# Altium PCB PCB.PcbDoc
Units mm, origin at the board's own origin, x right, y up, seen from the top; angles counter-clockwise.
Board outline 42.41 x 25.14 mm, 2 copper layers (Top Layer, Bottom Layer); 168 components, 11 nets, 360 pads, 0 vias.
Unrouted connection lines stored in the file: 1.
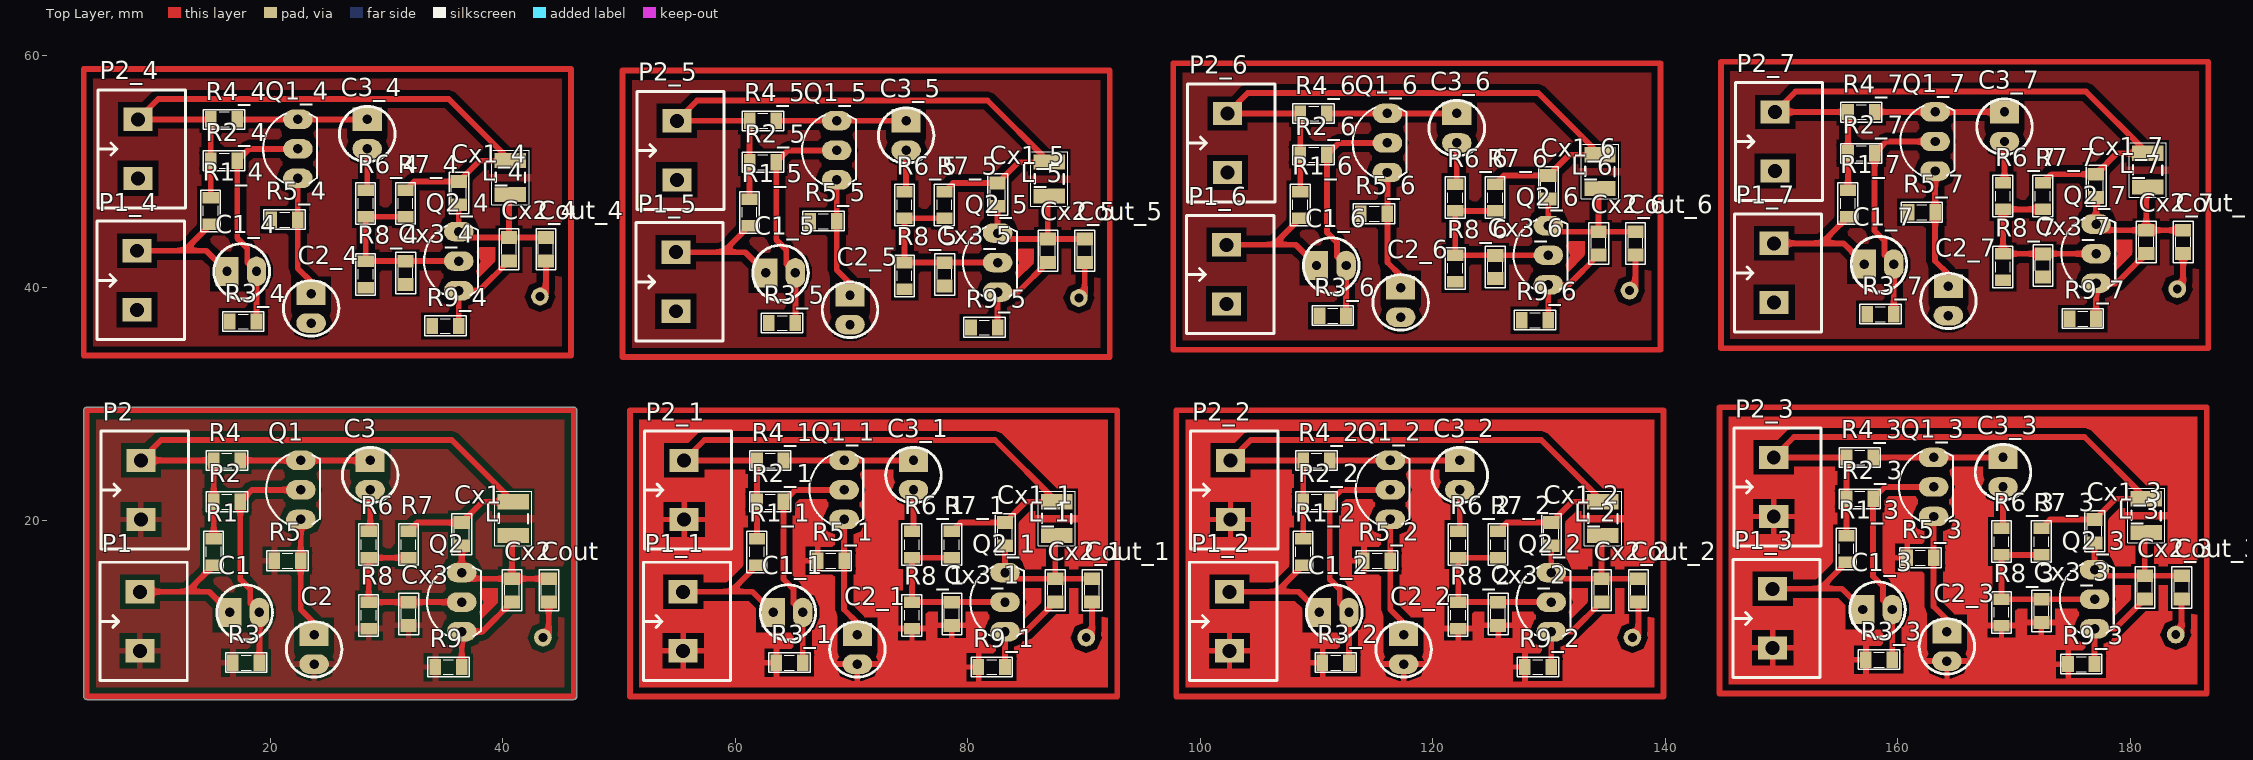
[diagram p0: Top Layer view]
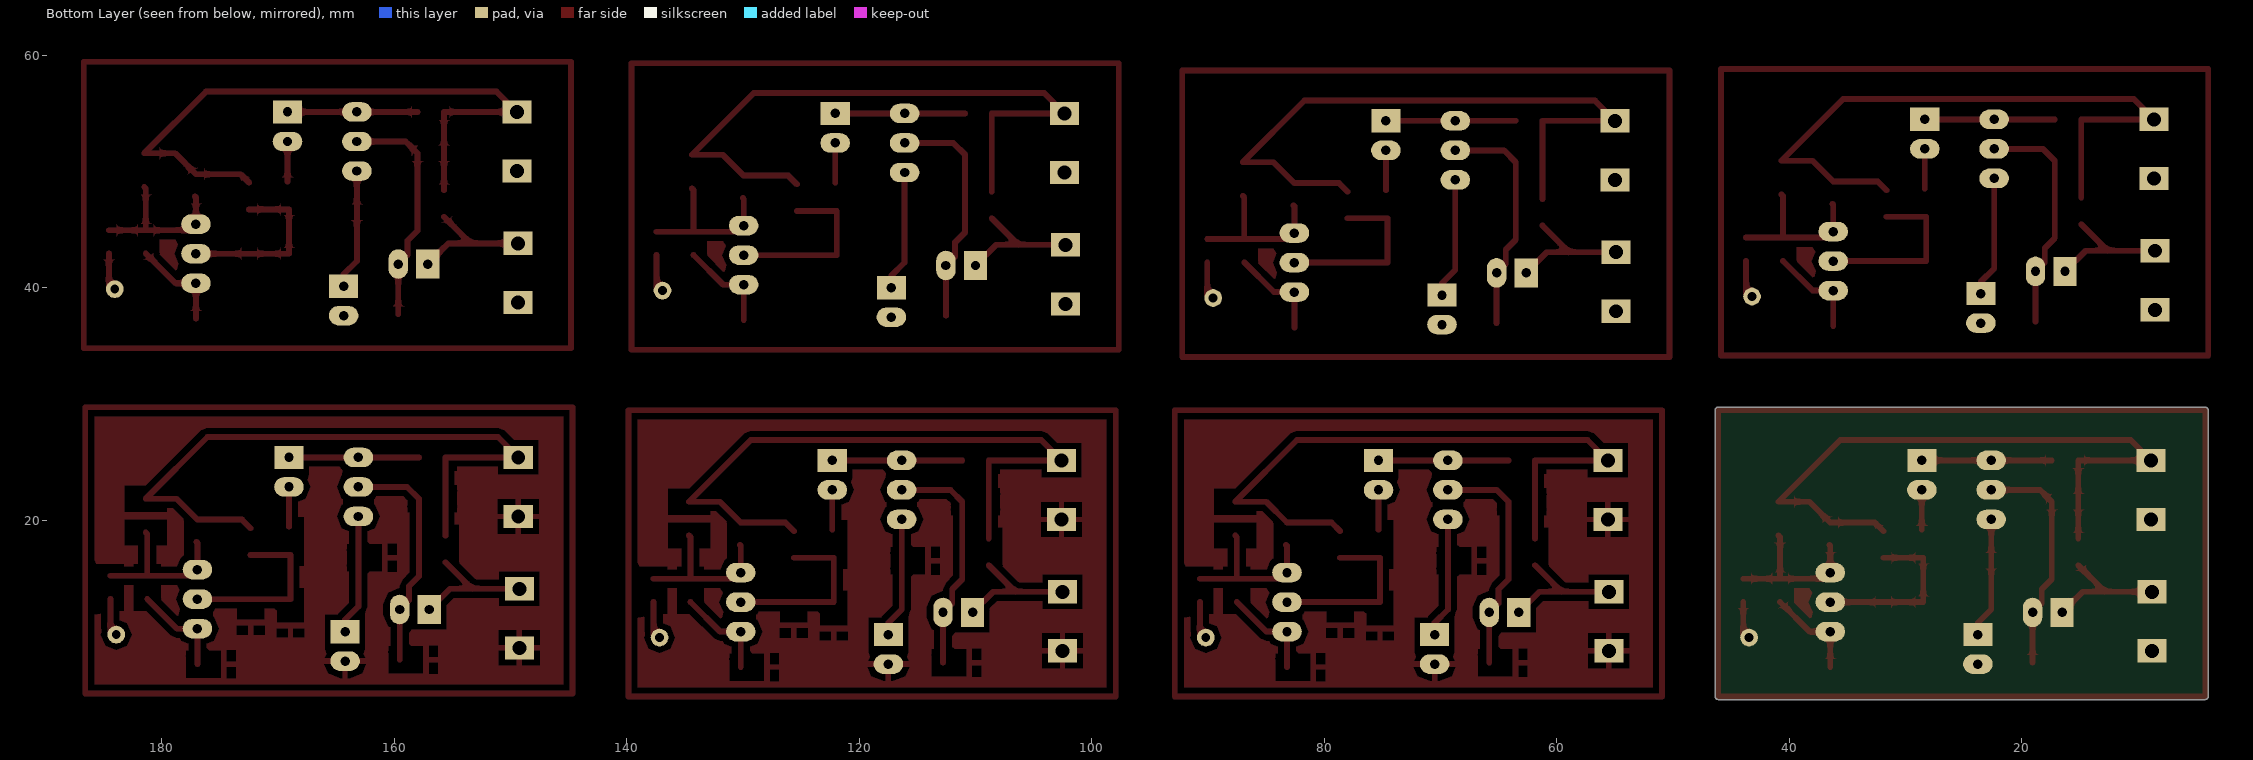
[diagram p1: Bottom Layer view, seen from below]

## Layer stack, top to bottom
Top Solder: solder mask 0.0102, Solder Resist, Dk 3.5
Top Layer: signal copper 0.0356
Dielectric 1: dielectric 0.32, FR-4, Dk 4.8
Bottom Layer: signal copper 0.0356
Bottom Solder: solder mask 0.0102, Solder Resist, Dk 3.5

## Board outline
4.191,4.576 cw(c4.191,4.826) 3.941,4.826 3.941,29.464 cw(c4.191,29.464) 4.191,29.714 46.101,29.714 cw(c46.101,29.464) 46.351,29.464 46.351,4.826 cw(c46.101,4.826) 46.101,4.576

## Design rules (kind name [scope] priority, off if disabled: settings)
Clearance [All] p1: gap=0.5
PlaneConnect [All] p1: planeconnectstyle=Relief reliefexpansion=0.508 reliefentries=4 reliefconductorwidth=5 reliefairgap=0.254
PolygonConnect [All] p1: connectstyle=Relief reliefconductorwidth=0.5 reliefentries=4 polygonreliefangle="90 Angle" airgapwidth=0.5
RoutingVias [All] p1: holewidth=0.711 width=1.27 viastyle="Through Hole" minholewidth=0.711 minwidth=1.27 maxholewidth=0.711 maxwidth=1.27
SolderMaskExpansion [All] p1: expansion=0.102
Width [All] p1: maxlimit=0.8 minlimit=0.5 preferedwidth=0.5
29 further rules are at their usual default settings.

## Classes and differential pairs
component class Sche: C1 C2 C3 Cout Cx1 Cx2 Cx3 L P1 P2 Q1 Q2 R1 R2 R3 R4 R5 R6 R7 R8 R9

## Components (designator, comment, footprint, x,y, rotation, side; value= is the part's Value field where it differs from the comment)
C1 "10u" CA-ALU-2.54 17.78,12.065 r0 top
C1_1 "10u" CA-ALU-2.54 64.516,12.065 r0 top (schematic designator C1)
C1_2 "10u" CA-ALU-2.54 111.506,12.065 r0 top (schematic designator C1)
C1_3 "10u" CA-ALU-2.54 158.242,12.319 r0 top (schematic designator C1)
C1_4 "10u" CA-ALU-2.54 17.526,41.402 r0 top (schematic designator C1)
C1_5 "10u" CA-ALU-2.54 63.881,41.275 r0 top (schematic designator C1)
C1_6 "10u" CA-ALU-2.54 111.252,41.91 r0 top (schematic designator C1)
C1_7 "10u" CA-ALU-2.54 158.369,42.037 r0 top (schematic designator C1)
C2 "47n" CA-ALU-2.54 23.749,8.89 r270 top
C2_1 "47n" CA-ALU-2.54 70.485,8.89 r270 top (schematic designator C2)
C2_2 "47n" CA-ALU-2.54 117.475,8.89 r270 top (schematic designator C2)
C2_3 "47n" CA-ALU-2.54 164.211,9.144 r270 top (schematic designator C2)
C2_4 "47n" CA-ALU-2.54 23.495,38.227 r270 top (schematic designator C2)
C2_5 "47n" CA-ALU-2.54 69.85,38.1 r270 top (schematic designator C2)
C2_6 "47n" CA-ALU-2.54 117.221,38.735 r270 top (schematic designator C2)
C2_7 "47n" CA-ALU-2.54 164.338,38.862 r270 top (schematic designator C2)
C3 "10u" CA-ALU-2.54 28.575,23.876 r270 top
C3_1 "10u" CA-ALU-2.54 75.311,23.876 r270 top (schematic designator C3)
C3_2 "10u" CA-ALU-2.54 122.301,23.876 r270 top (schematic designator C3)
C3_3 "10u" CA-ALU-2.54 169.037,24.13 r270 top (schematic designator C3)
C3_4 "10u" CA-ALU-2.54 28.321,53.213 r270 top (schematic designator C3)
C3_5 "10u" CA-ALU-2.54 74.676,53.086 r270 top (schematic designator C3)
C3_6 "10u" CA-ALU-2.54 122.047,53.721 r270 top (schematic designator C3)
C3_7 "10u" CA-ALU-2.54 169.164,53.848 r270 top (schematic designator C3)
Cout "33pF" CN-SMD-0805 43.942,13.97 r90 top
Cout_1 "33pF" CN-SMD-0805 90.678,13.97 r90 top (schematic designator Cout)
Cout_2 "33pF" CN-SMD-0805 137.668,13.97 r90 top (schematic designator Cout)
Cout_3 "33pF" CN-SMD-0805 184.404,14.224 r90 top (schematic designator Cout)
Cout_4 "33pF" CN-SMD-0805 43.688,43.307 r90 top (schematic designator Cout)
Cout_5 "33pF" CN-SMD-0805 90.043,43.18 r90 top (schematic designator Cout)
Cout_6 "33pF" CN-SMD-0805 137.414,43.815 r90 top (schematic designator Cout)
Cout_7 "33pF" CN-SMD-0805 184.531,43.942 r90 top (schematic designator Cout)
Cx1 "3pF" CN-SMD-0805 36.449,18.796 r90 top
Cx1_1 "3pF" CN-SMD-0805 83.185,18.796 r90 top (schematic designator Cx1)
Cx1_2 "3pF" CN-SMD-0805 130.175,18.796 r90 top (schematic designator Cx1)
Cx1_3 "3pF" CN-SMD-0805 176.911,19.05 r90 top (schematic designator Cx1)
Cx1_4 "3pF" CN-SMD-0805 36.195,48.133 r90 top (schematic designator Cx1)
Cx1_5 "3pF" CN-SMD-0805 82.55,48.006 r90 top (schematic designator Cx1)
Cx1_6 "3pF" CN-SMD-0805 129.921,48.641 r90 top (schematic designator Cx1)
Cx1_7 "3pF" CN-SMD-0805 177.038,48.768 r90 top (schematic designator Cx1)
Cx2 "33pF" CN-SMD-0805 40.767,13.97 r90 top
Cx2_1 "33pF" CN-SMD-0805 87.503,13.97 r90 top (schematic designator Cx2)
Cx2_2 "33pF" CN-SMD-0805 134.493,13.97 r90 top (schematic designator Cx2)
Cx2_3 "33pF" CN-SMD-0805 181.229,14.224 r90 top (schematic designator Cx2)
Cx2_4 "33pF" CN-SMD-0805 40.513,43.307 r90 top (schematic designator Cx2)
Cx2_5 "33pF" CN-SMD-0805 86.868,43.18 r90 top (schematic designator Cx2)
Cx2_6 "33pF" CN-SMD-0805 134.239,43.815 r90 top (schematic designator Cx2)
Cx2_7 "33pF" CN-SMD-0805 181.356,43.942 r90 top (schematic designator Cx2)
Cx3 "3pF" CN-SMD-0805 31.877,11.938 r90 top
Cx3_1 "3pF" CN-SMD-0805 78.613,11.938 r90 top (schematic designator Cx3)
Cx3_2 "3pF" CN-SMD-0805 125.603,11.938 r90 top (schematic designator Cx3)
Cx3_3 "3pF" CN-SMD-0805 172.339,12.192 r90 top (schematic designator Cx3)
Cx3_4 "3pF" CN-SMD-0805 31.623,41.275 r90 top (schematic designator Cx3)
Cx3_5 "3pF" CN-SMD-0805 77.978,41.148 r90 top (schematic designator Cx3)
Cx3_6 "3pF" CN-SMD-0805 125.349,41.783 r90 top (schematic designator Cx3)
Cx3_7 "3pF" CN-SMD-0805 172.466,41.91 r90 top (schematic designator Cx3)
L "150n" RES-SMD-1210 40.894,20.193 r270 top
L_1 "150n" RES-SMD-1210 87.63,20.193 r270 top (schematic designator L)
L_2 "150n" RES-SMD-1210 134.62,20.193 r270 top (schematic designator L)
L_3 "150n" RES-SMD-1210 181.356,20.447 r270 top (schematic designator L)
L_4 "150n" RES-SMD-1210 40.64,49.53 r270 top (schematic designator L)
L_5 "150n" RES-SMD-1210 86.995,49.403 r270 top (schematic designator L)
L_6 "150n" RES-SMD-1210 134.366,50.038 r270 top (schematic designator L)
L_7 "150n" RES-SMD-1210 181.483,50.165 r270 top (schematic designator L)
P1 "Domino 2" "DOMINO 2- 5mm" 8.763,11.303 r90 top
P1_1 "Domino 2" "DOMINO 2- 5mm" 55.499,11.303 r90 top (schematic designator P1)
P1_2 "Domino 2" "DOMINO 2- 5mm" 102.489,11.303 r90 top (schematic designator P1)
P1_3 "Domino 2" "DOMINO 2- 5mm" 149.225,11.557 r90 top (schematic designator P1)
P1_4 "Domino 2" "DOMINO 2- 5mm" 8.509,40.64 r90 top (schematic designator P1)
P1_5 "Domino 2" "DOMINO 2- 5mm" 54.864,40.513 r90 top (schematic designator P1)
P1_6 "Domino 2" "DOMINO 2- 5mm" 102.235,41.148 r90 top (schematic designator P1)
P1_7 "Domino 2" "DOMINO 2- 5mm" 149.352,41.275 r90 top (schematic designator P1)
P2 "Domino 2" "DOMINO 2- 5mm" 8.851,22.606 r90 top
P2_1 "Domino 2" "DOMINO 2- 5mm" 55.587,22.606 r90 top (schematic designator P2)
P2_2 "Domino 2" "DOMINO 2- 5mm" 102.577,22.606 r90 top (schematic designator P2)
P2_3 "Domino 2" "DOMINO 2- 5mm" 149.313,22.86 r90 top (schematic designator P2)
P2_4 "Domino 2" "DOMINO 2- 5mm" 8.597,51.943 r90 top (schematic designator P2)
P2_5 "Domino 2" "DOMINO 2- 5mm" 54.952,51.816 r90 top (schematic designator P2)
P2_6 "Domino 2" "DOMINO 2- 5mm" 102.323,52.451 r90 top (schematic designator P2)
P2_7 "Domino 2" "DOMINO 2- 5mm" 149.44,52.578 r90 top (schematic designator P2)
Q1 "2N222" TO92-123 22.606,22.606 r90 top
Q1_1 "2N222" TO92-123 69.342,22.606 r90 top (schematic designator Q1)
Q1_2 "2N222" TO92-123 116.332,22.606 r90 top (schematic designator Q1)
Q1_3 "2N222" TO92-123 163.068,22.86 r90 top (schematic designator Q1)
Q1_4 "2N222" TO92-123 22.352,51.943 r90 top (schematic designator Q1)
Q1_5 "2N222" TO92-123 68.707,51.816 r90 top (schematic designator Q1)
Q1_6 "2N222" TO92-123 116.078,52.451 r90 top (schematic designator Q1)
Q1_7 "2N222" TO92-123 163.195,52.578 r90 top (schematic designator Q1)
Q2 "2N222" TO92-123 36.449,12.954 r90 top
Q2_1 "2N222" TO92-123 83.185,12.954 r90 top (schematic designator Q2)
Q2_2 "2N222" TO92-123 130.175,12.954 r90 top (schematic designator Q2)
Q2_3 "2N222" TO92-123 176.911,13.208 r90 top (schematic designator Q2)
Q2_4 "2N222" TO92-123 36.195,42.291 r90 top (schematic designator Q2)
Q2_5 "2N222" TO92-123 82.55,42.164 r90 top (schematic designator Q2)
Q2_6 "2N222" TO92-123 129.921,42.799 r90 top (schematic designator Q2)
Q2_7 "2N222" TO92-123 177.038,42.926 r90 top (schematic designator Q2)
R1 "1k" RES-SMD-0805 15.113,17.272 r270 top
R1_1 "1k" RES-SMD-0805 61.849,17.272 r270 top (schematic designator R1)
R1_2 "1k" RES-SMD-0805 108.839,17.272 r270 top (schematic designator R1)
R1_3 "1k" RES-SMD-0805 155.575,17.526 r270 top (schematic designator R1)
R1_4 "1k" RES-SMD-0805 14.859,46.609 r270 top (schematic designator R1)
R1_5 "1k" RES-SMD-0805 61.214,46.482 r270 top (schematic designator R1)
R1_6 "1k" RES-SMD-0805 108.585,47.117 r270 top (schematic designator R1)
R1_7 "1k" RES-SMD-0805 155.702,47.244 r270 top (schematic designator R1)
R2 "15k" RES-SMD-0805 16.256,21.59 r0 top
R2_1 "15k" RES-SMD-0805 62.992,21.59 r0 top (schematic designator R2)
R2_2 "15k" RES-SMD-0805 109.982,21.59 r0 top (schematic designator R2)
R2_3 "15k" RES-SMD-0805 156.718,21.844 r0 top (schematic designator R2)
R2_4 "15k" RES-SMD-0805 16.002,50.927 r0 top (schematic designator R2)
R2_5 "15k" RES-SMD-0805 62.357,50.8 r0 top (schematic designator R2)
R2_6 "15k" RES-SMD-0805 109.728,51.435 r0 top (schematic designator R2)
R2_7 "15k" RES-SMD-0805 156.845,51.562 r0 top (schematic designator R2)
R3 "6.8k" RES-SMD-0805 17.907,7.747 r180 top
R3_1 "6.8k" RES-SMD-0805 64.643,7.747 r180 top (schematic designator R3)
R3_2 "6.8k" RES-SMD-0805 111.633,7.747 r180 top (schematic designator R3)
R3_3 "6.8k" RES-SMD-0805 158.369,8.001 r180 top (schematic designator R3)
R3_4 "6.8k" RES-SMD-0805 17.653,37.084 r180 top (schematic designator R3)
R3_5 "6.8k" RES-SMD-0805 64.008,36.957 r180 top (schematic designator R3)
R3_6 "6.8k" RES-SMD-0805 111.379,37.592 r180 top (schematic designator R3)
R3_7 "6.8k" RES-SMD-0805 158.496,37.719 r180 top (schematic designator R3)
R4 "10k" RES-SMD-0805 16.256,25.146 r0 top
R4_1 "10k" RES-SMD-0805 62.992,25.146 r0 top (schematic designator R4)
R4_2 "10k" RES-SMD-0805 109.982,25.146 r0 top (schematic designator R4)
R4_3 "10k" RES-SMD-0805 156.718,25.4 r0 top (schematic designator R4)
R4_4 "10k" RES-SMD-0805 16.002,54.483 r0 top (schematic designator R4)
R4_5 "10k" RES-SMD-0805 62.357,54.356 r0 top (schematic designator R4)
R4_6 "10k" RES-SMD-0805 109.728,54.991 r0 top (schematic designator R4)
R4_7 "10k" RES-SMD-0805 156.845,55.118 r0 top (schematic designator R4)
R5 "4.7k" RES-SMD-0805 21.463,16.51 r180 top
R5_1 "4.7k" RES-SMD-0805 68.199,16.51 r180 top (schematic designator R5)
R5_2 "4.7k" RES-SMD-0805 115.189,16.51 r180 top (schematic designator R5)
R5_3 "4.7k" RES-SMD-0805 161.925,16.764 r180 top (schematic designator R5)
R5_4 "4.7k" RES-SMD-0805 21.209,45.847 r180 top (schematic designator R5)
R5_5 "4.7k" RES-SMD-0805 67.564,45.72 r180 top (schematic designator R5)
R5_6 "4.7k" RES-SMD-0805 114.935,46.355 r180 top (schematic designator R5)
R5_7 "4.7k" RES-SMD-0805 162.052,46.482 r180 top (schematic designator R5)
R6 "1k" RES-SMD-0805 28.448,17.907 r270 top
R6_1 "1k" RES-SMD-0805 75.184,17.907 r270 top (schematic designator R6)
R6_2 "1k" RES-SMD-0805 122.174,17.907 r270 top (schematic designator R6)
R6_3 "1k" RES-SMD-0805 168.91,18.161 r270 top (schematic designator R6)
R6_4 "1k" RES-SMD-0805 28.194,47.244 r270 top (schematic designator R6)
R6_5 "1k" RES-SMD-0805 74.549,47.117 r270 top (schematic designator R6)
R6_6 "1k" RES-SMD-0805 121.92,47.752 r270 top (schematic designator R6)
R6_7 "1k" RES-SMD-0805 169.037,47.879 r270 top (schematic designator R6)
R7 "4.7k" RES-SMD-0805 31.877,17.907 r270 top
R7_1 "4.7k" RES-SMD-0805 78.613,17.907 r270 top (schematic designator R7)
R7_2 "4.7k" RES-SMD-0805 125.603,17.907 r270 top (schematic designator R7)
R7_3 "4.7k" RES-SMD-0805 172.339,18.161 r270 top (schematic designator R7)
R7_4 "4.7k" RES-SMD-0805 31.623,47.244 r270 top (schematic designator R7)
R7_5 "4.7k" RES-SMD-0805 77.978,47.117 r270 top (schematic designator R7)
R7_6 "4.7k" RES-SMD-0805 125.349,47.752 r270 top (schematic designator R7)
R7_7 "4.7k" RES-SMD-0805 172.466,47.879 r270 top (schematic designator R7)
R8 "2.2k" RES-SMD-0805 28.448,11.811 r270 top
R8_1 "2.2k" RES-SMD-0805 75.184,11.811 r270 top (schematic designator R8)
R8_2 "2.2k" RES-SMD-0805 122.174,11.811 r270 top (schematic designator R8)
R8_3 "2.2k" RES-SMD-0805 168.91,12.065 r270 top (schematic designator R8)
R8_4 "2.2k" RES-SMD-0805 28.194,41.148 r270 top (schematic designator R8)
R8_5 "2.2k" RES-SMD-0805 74.549,41.021 r270 top (schematic designator R8)
R8_6 "2.2k" RES-SMD-0805 121.92,41.656 r270 top (schematic designator R8)
R8_7 "2.2k" RES-SMD-0805 169.037,41.783 r270 top (schematic designator R8)
R9 "330" RES-SMD-0805 35.306,7.366 r180 top
R9_1 "330" RES-SMD-0805 82.042,7.366 r180 top (schematic designator R9)
R9_2 "330" RES-SMD-0805 129.032,7.366 r180 top (schematic designator R9)
R9_3 "330" RES-SMD-0805 175.768,7.62 r180 top (schematic designator R9)
R9_4 "330" RES-SMD-0805 35.052,36.703 r180 top (schematic designator R9)
R9_5 "330" RES-SMD-0805 81.407,36.576 r180 top (schematic designator R9)
R9_6 "330" RES-SMD-0805 128.778,37.211 r180 top (schematic designator R9)
R9_7 "330" RES-SMD-0805 175.895,37.338 r180 top (schematic designator R9)

## Footprints (in the part's own frame and the unit in brackets; to place one, negate y for a bottom-side part, rotate by r counter-clockwise, add the part's x,y. Pads: shape width x height; smd on the part's side, far side on the other; paste and mask are expansions set on the pad)
CA-ALU-2.54 [mm]
  rect 2x2.5 hole 0.813: 1(-1.27,0)
  oval 1.676x2.54 hole 0.813: 2(1.27,0)
  silkscreen extent -2.39,-2.39 2.39,2.39, body extent -2,-2.03 1.99,1.97, height 7.01
CN-SMD-0805 [mm]
  rect 1.1x1.397 smd: 1(-1,0) 2(1,0)
  silkscreen extent -1.78,-0.86 1.78,0.84, body extent -1,-0.62 1,0.63, height 0.8
"DOMINO 2- 5mm" [mm]
  rect 2x2.5 hole 1.2: 1(-2.54,0) 2(2.54,0)
  silkscreen extent -5.08,-4.08 5.08,3.43, body extent -5,-4.07 5,3.43, height 10
RES-SMD-0805 [mil]
  rect 39.37x55 smd: 1(-45,0) 2(45,0)
  silkscreen extent -70,-34 70,33, body extent -39,-25 39,25, height 31
RES-SMD-1210 [mm] "Chip Capacitor, Body 3.2x2.5mm, IPC Medium Density"
  rect 1.3x2.7 smd: 1(-1.397,0) 2(1.503,0)
  silkscreen extent -2.3,-1.6 2.4,1.6, body extent -1.6,-1.25 1.6,1.25, height 0.6
TO92-123 [mil] "TO-92"
  oval 66x100 hole 32: 1(-100,0) 2(0,0) 3(100,0)
  silkscreen extent -117,-65 120,118, body extent -109,-66 109,95, height 245

## Part data
C1 C1_1 C1_2 C1_3 C1_4 C1_5 C1_6 C1_7 C2 C2_1 C2_2 C2_3 C2_4 C2_5 C2_6 C2_7 C3 C3_1 C3_2 C3_3 C3_4 C3_5 C3_6 C3_7: library part CN-ALU-DIP, "Capacitor (Semiconductor SIM Model)"
Cout Cout_1 Cout_2 Cout_3 Cout_4 Cout_5 Cout_6 Cout_7 Cx1 Cx1_1 Cx1_2 Cx1_3 Cx1_4 Cx1_5 Cx1_6 Cx1_7 Cx2 Cx2_1 Cx2_2 Cx2_3 Cx2_4 Cx2_5 Cx2_6 Cx2_7 Cx3 Cx3_1 Cx3_2 Cx3_3 Cx3_4 Cx3_5 Cx3_6 Cx3_7: library part CN
L L_1 L_2 L_3 L_4 L_5 L_6 L_7 R1 R1_1 R1_2 R1_3 R1_4 R1_5 R1_6 R1_7 R2 R2_1 R2_2 R2_3 R2_4 R2_5 R2_6 R2_7 R3 R3_1 R3_2 R3_3 R3_4 R3_5 R3_6 R3_7 R4 R4_1 R4_2 R4_3 R4_4 R4_5 R4_6 R4_7 R5 R5_1 R5_2 R5_3 R5_4 R5_5 R5_6 R5_7 R6 R6_1 R6_2 R6_3 R6_4 R6_5 R6_6 R6_7 R7 R7_1 R7_2 R7_3 R7_4 R7_5 R7_6 R7_7 R8 R8_1 R8_2 R8_3 R8_4 R8_5 R8_6 R8_7 R9 R9_1 R9_2 R9_3 R9_4 R9_5 R9_6 R9_7: library part Res-SMD, "Resistor"
P1 P1_1 P1_2 P1_3 P1_4 P1_5 P1_6 P1_7 P2 P2_1 P2_2 P2_3 P2_4 P2_5 P2_6 P2_7: "Domino, 2-Pin"
Q1 Q1_1 Q1_2 Q1_3 Q1_4 Q1_5 Q1_6 Q1_7 Q2 Q2_1 Q2_2 Q2_3 Q2_4 Q2_5 Q2_6 Q2_7: "NPN 600mW, ECB"

## Free pads (board coordinates)
  round 1.524 hole 0.762: 3(43.18,39.243) 3(43.434,9.906) 3(89.535,39.116) 3(90.17,9.906) 3(136.906,39.751) 3(137.16,9.906) 3(183.896,10.16) 3(184.023,39.878)

## Nets (pads, with @x,y where several pads share a name; then routed paths per layer and width w, separated by ;. In a path a pad name is that pad's centre, name@x,y a point inside that pad or via, vN(x,y) a via of type N, cw(c..) or ccw(c..) an arc to the next point about the centre after c; other vN are vias at no path point)
GND: C2.2 Cx3.1 P1.1 P2.1 R3.2 R5.2 R8.2 R9.2
NetC1_1: C1.1 P1.2 R1.2 | length 11.7
  Top Layer w0.5: P1.2 12.827,13.843 ; R1.2 12.827,13.843 ; C1.1 14.732,13.843 12.827,13.843
NetC1_2: C1.2 Q1.2 R2.2 R3.1 | length 20.2
  Top Layer w0.5: R3.1 C1.2 18.26,12.855 18.26,14.065 17.399,14.926 R2.2 18.415,22.606 Q1.2
NetC2_1: C2.1 Q1.1 R5.1 | length 10.4
  Top Layer w0.5: Q1.1 22.606,12.319 23.749,11.176 C2.1
NetC3_1: C3.1 Q1.3 R4.2 | length 11.2
  Top Layer w0.5: R4.2 Q1.3 C3.1
NetC3_2: C3.2 R6.1 | length 3.4
  Top Layer w0.5: R6.1@28.575,19.177 C3.2
NetCout_2: Cout.2 Cx1.1 Cx2.2 L.2 Q2.3 | length 13.9
  Top Layer w0.5: Cx1.1@36.522,17.869 Cx1.1 Q2.3 36.973,14.97 Cx2.2 ; L.2 40.767,18.563 Cx2.2 ; Cout.2 Cx2.2
NetCx2_1: Cx2.1 Q2.1 R9.1 | length 8.4
  Top Layer w0.5: R9.1 Q2.1 38.211,10.414 Cx2.1
NetCx3_2: Cx3.2 Q2.2 R6.2 R7.2 R8.1 | length 15.2
  Top Layer w0.5: R7.2 R6.2 R8.1 Q2.2
OUT: Cout.1 pad.3@43.434,9.906 | length 3.3
  Top Layer w0.5: pad.3@43.434,9.906 43.942,10.414 Cout.1
VCC: Cx1.2 L.1 P2.2 R1.1 R2.1 R4.1 R7.1 | length 58
  Top Layer w0.5: R1.1 R2.1 R4.1 P2.2 10.601,26.896 35.588,26.896 L.1 38.243,21.59 Cx1.2 32.623,19.796 R7.1
pads on no net: C1_1.1 C1_1.2 C1_2.1 C1_2.2 C1_3.1 C1_3.2 C1_4.1 C1_4.2 C1_5.1 C1_5.2 C1_6.1 C1_6.2 C1_7.1 C1_7.2 C2_1.1 C2_1.2 C2_2.1 C2_2.2 C2_3.1 C2_3.2 C2_4.1 C2_4.2 C2_5.1 C2_5.2 C2_6.1 C2_6.2 C2_7.1 C2_7.2 C3_1.1 C3_1.2 C3_2.1 C3_2.2 C3_3.1 C3_3.2 C3_4.1 C3_4.2 C3_5.1 C3_5.2 C3_6.1 C3_6.2 C3_7.1 C3_7.2 Cout_1.1 Cout_1.2 Cout_2.1 Cout_2.2 Cout_3.1 Cout_3.2 Cout_4.1 Cout_4.2 Cout_5.1 Cout_5.2 Cout_6.1 Cout_6.2 Cout_7.1 Cout_7.2 Cx1_1.1 Cx1_1.2 Cx1_2.1 Cx1_2.2 Cx1_3.1 Cx1_3.2 Cx1_4.1 Cx1_4.2 Cx1_5.1 Cx1_5.2 Cx1_6.1 Cx1_6.2 Cx1_7.1 Cx1_7.2 Cx2_1.1 Cx2_1.2 Cx2_2.1 Cx2_2.2 Cx2_3.1 Cx2_3.2 Cx2_4.1 Cx2_4.2 Cx2_5.1 Cx2_5.2 Cx2_6.1 Cx2_6.2 Cx2_7.1 Cx2_7.2 Cx3_1.1 Cx3_1.2 Cx3_2.1 Cx3_2.2 Cx3_3.1 Cx3_3.2 Cx3_4.1 Cx3_4.2 Cx3_5.1 Cx3_5.2 Cx3_6.1 Cx3_6.2 Cx3_7.1 Cx3_7.2 L_1.1 L_1.2 L_2.1 L_2.2 L_3.1 L_3.2 L_4.1 L_4.2 L_5.1 L_5.2 L_6.1 L_6.2 L_7.1 L_7.2 P1_1.1 P1_1.2 P1_2.1 P1_2.2 P1_3.1 P1_3.2 P1_4.1 P1_4.2 P1_5.1 P1_5.2 P1_6.1 P1_6.2 P1_7.1 P1_7.2 P2_1.1 P2_1.2 P2_2.1 P2_2.2 P2_3.1 P2_3.2 P2_4.1 P2_4.2 P2_5.1 P2_5.2 P2_6.1 P2_6.2 P2_7.1 P2_7.2 Q1_1.1 Q1_1.2 Q1_1.3 Q1_2.1 Q1_2.2 Q1_2.3 Q1_3.1 Q1_3.2 Q1_3.3 Q1_4.1 Q1_4.2 Q1_4.3 Q1_5.1 Q1_5.2 Q1_5.3 Q1_6.1 Q1_6.2 Q1_6.3 Q1_7.1 Q1_7.2 Q1_7.3 Q2_1.1 Q2_1.2 Q2_1.3 Q2_2.1 Q2_2.2 Q2_2.3 Q2_3.1 Q2_3.2 Q2_3.3 Q2_4.1 Q2_4.2 Q2_4.3 Q2_5.1 Q2_5.2 Q2_5.3 Q2_6.1 Q2_6.2 Q2_6.3 Q2_7.1 Q2_7.2 Q2_7.3 R1_1.1 R1_1.2 R1_2.1 R1_2.2 R1_3.1 R1_3.2 R1_4.1 R1_4.2 R1_5.1 R1_5.2 R1_6.1 R1_6.2 R1_7.1 R1_7.2 R2_1.1 R2_1.2 R2_2.1 R2_2.2 R2_3.1 R2_3.2 R2_4.1 R2_4.2 R2_5.1 R2_5.2 R2_6.1 R2_6.2 R2_7.1 R2_7.2 R3_1.1 R3_1.2 R3_2.1 R3_2.2 R3_3.1 R3_3.2 R3_4.1 R3_4.2 R3_5.1 R3_5.2 R3_6.1 R3_6.2 R3_7.1 R3_7.2 R4_1.1 R4_1.2 R4_2.1 R4_2.2 R4_3.1 R4_3.2 R4_4.1 R4_4.2 R4_5.1 R4_5.2 R4_6.1 R4_6.2 R4_7.1 R4_7.2 R5_1.1 R5_1.2 R5_2.1 R5_2.2 R5_3.1 R5_3.2 R5_4.1 R5_4.2 R5_5.1 R5_5.2 R5_6.1 R5_6.2 R5_7.1 R5_7.2 R6_1.1 R6_1.2 R6_2.1 R6_2.2 R6_3.1 R6_3.2 R6_4.1 R6_4.2 R6_5.1 R6_5.2 R6_6.1 R6_6.2 R6_7.1 R6_7.2 R7_1.1 R7_1.2 R7_2.1 R7_2.2 R7_3.1 R7_3.2 R7_4.1 R7_4.2 R7_5.1 R7_5.2 R7_6.1 R7_6.2 R7_7.1 R7_7.2 R8_1.1 R8_1.2 R8_2.1 R8_2.2 R8_3.1 R8_3.2 R8_4.1 R8_4.2 R8_5.1 R8_5.2 R8_6.1 R8_6.2 R8_7.1 R8_7.2 R9_1.1 R9_1.2 R9_2.1 R9_2.2 R9_3.1 R9_3.2 R9_4.1 R9_4.2 R9_5.1 R9_5.2 R9_6.1 R9_6.2 R9_7.1 R9_7.2
copper on no net: | length 2154.7
  Top Layer w0.5: 8.509,43.18 12.573,43.18 ; 14.859,45.466 12.573,43.18 ; 14.859,47.752 14.859,50.927 14.859,54.483 8.597,54.483 10.347,56.233 35.334,56.233 40.64,50.927 37.989,50.927 36.195,49.133 32.369,49.133 31.623,48.387 ; 16.256,41.402 14.478,43.18 12.573,43.18 ; 17.145,54.483 22.352,54.483 28.321,54.483 ; 18.796,37.084 18.796,41.402 18.006,42.192 18.006,43.402 17.145,44.263 17.145,50.927 18.161,51.943 22.352,51.943 ; 22.352,49.403 22.352,41.656 23.495,40.513 23.495,39.497 ; 28.321,48.514 28.321,51.943 ; 31.623,46.101 28.194,46.101 28.194,42.291 36.195,42.291 ; 36.195,36.703 36.195,39.751 37.957,39.751 40.513,42.307 ; 36.268,47.206 36.195,47.133 36.195,44.831 36.719,44.307 40.513,44.307 ; 40.64,48.027 40.513,47.9 40.513,44.307 ; 43.18,39.243 43.688,39.751 43.688,42.307 ; 43.688,44.307 40.513,44.307 ; 54.864,43.053 58.928,43.053 ; 55.499,13.843 59.563,13.843 ; 61.214,45.339 58.928,43.053 ; 61.214,47.625 61.214,50.8 61.214,54.356 54.952,54.356 56.702,56.106 81.689,56.106 86.995,50.8 84.344,50.8 82.55,49.006 78.724,49.006 77.978,48.26 ; 61.849,16.129 59.563,13.843 ; 61.849,18.415 61.849,21.59 61.849,25.146 55.587,25.146 57.337,26.896 82.324,26.896 87.63,21.59 84.979,21.59 83.185,19.796 79.359,19.796 78.613,19.05 ; 62.611,41.275 60.833,43.053 58.928,43.053 ; 63.246,12.065 61.468,13.843 59.563,13.843 ; 63.5,54.356 68.707,54.356 74.676,54.356 ; 64.135,25.146 69.342,25.146 75.311,25.146 ; 65.151,36.957 65.151,41.275 64.361,42.065 64.361,43.275 63.5,44.136 63.5,50.8 64.516,51.816 68.707,51.816 ; 65.786,7.747 65.786,12.065 64.996,12.855 64.996,14.065 64.135,14.926 64.135,21.59 65.151,22.606 69.342,22.606 ; 68.707,49.276 68.707,41.529 69.85,40.386 69.85,39.37 ; 69.342,20.066 69.342,12.319 70.485,11.176 70.485,10.16 ; 74.676,48.387 74.676,51.816 ; 75.311,19.177 75.311,22.606 ; 77.978,45.974 74.549,45.974 74.549,42.164 82.55,42.164 ; 78.613,16.764 75.184,16.764 75.184,12.954 83.185,12.954 ; 82.55,36.576 82.55,39.624 84.312,39.624 86.868,42.18 ; 82.623,47.079 82.55,47.006 82.55,44.704 83.074,44.18 86.868,44.18 ; 83.185,7.366 83.185,10.414 84.947,10.414 87.503,12.97 ; 83.258,17.869 83.185,17.796 83.185,15.494 83.709,14.97 87.503,14.97 ; 86.995,47.9 86.868,47.773 86.868,44.18 ; 87.63,18.69 87.503,18.563 87.503,14.97 ; 89.535,39.116 90.043,39.624 90.043,42.18 ; 90.043,44.18 86.868,44.18 ; 90.17,9.906 90.678,10.414 90.678,12.97 ; 90.678,14.97 87.503,14.97 ; 102.235,43.688 106.299,43.688 ; 102.489,13.843 106.553,13.843 ; 108.585,45.974 106.299,43.688 ; 108.585,48.26 108.585,51.435 108.585,54.991 102.323,54.991 104.073,56.741 129.06,56.741 134.366,51.435 131.715,51.435 129.921,49.641 126.095,49.641 125.349,48.895 ; 108.839,16.129 106.553,13.843 ; 108.839,18.415 108.839,21.59 108.839,25.146 102.577,25.146 104.327,26.896 129.314,26.896 134.62,21.59 131.969,21.59 130.175,19.796 126.349,19.796 125.603,19.05 ; 109.982,41.91 108.204,43.688 106.299,43.688 ; 110.236,12.065 108.458,13.843 106.553,13.843 ; 110.871,54.991 116.078,54.991 122.047,54.991 ; 111.125,25.146 116.332,25.146 122.301,25.146 ; 112.522,37.592 112.522,41.91 111.732,42.7 111.732,43.91 110.871,44.771 110.871,51.435 111.887,52.451 116.078,52.451 ; 112.776,7.747 112.776,12.065 111.986,12.855 111.986,14.065 111.125,14.926 111.125,21.59 112.141,22.606 116.332,22.606 ; 116.078,49.911 116.078,42.164 117.221,41.021 117.221,40.005 ; 116.332,20.066 116.332,12.319 117.475,11.176 117.475,10.16 ; 122.047,49.022 122.047,52.451 ; 122.301,19.177 122.301,22.606 ; 125.349,46.609 121.92,46.609 121.92,42.799 129.921,42.799 ; 125.603,16.764 122.174,16.764 122.174,12.954 130.175,12.954 ; 129.921,37.211 129.921,40.259 131.683,40.259 134.239,42.815 ; 129.994,47.714 129.921,47.641 129.921,45.339 130.445,44.815 134.239,44.815 ; 130.175,7.366 130.175,10.414 131.937,10.414 134.493,12.97 ; 130.248,17.869 130.175,17.796 130.175,15.494 130.699,14.97 134.493,14.97 ; 134.366,48.535 134.239,48.408 134.239,44.815 ; 134.62,18.69 134.493,18.563 134.493,14.97 ; 136.906,39.751 137.414,40.259 137.414,42.815 ; 137.16,9.906 137.668,10.414 137.668,12.97 ; 137.414,44.815 134.239,44.815 ; 137.668,14.97 134.493,14.97 ; 149.225,14.097 153.289,14.097 ; 149.352,43.815 153.416,43.815 ; 155.575,16.383 153.289,14.097 ; 155.575,18.669 155.575,21.844 155.575,25.4 149.313,25.4 151.063,27.15 176.05,27.15 181.356,21.844 178.705,21.844 176.911,20.05 173.085,20.05 172.339,19.304 ; 155.702,46.101 153.416,43.815 ; 155.702,48.387 155.702,51.562 155.702,55.118 149.44,55.118 151.19,56.868 176.177,56.868 181.483,51.562 178.832,51.562 177.038,49.768 173.212,49.768 172.466,49.022 ; 156.972,12.319 155.194,14.097 153.289,14.097 ; 157.099,42.037 155.321,43.815 153.416,43.815 ; 157.861,25.4 163.068,25.4 169.037,25.4 ; 157.988,55.118 163.195,55.118 169.164,55.118 ; 159.512,8.001 159.512,12.319 158.722,13.109 158.722,14.319 157.861,15.18 157.861,21.844 158.877,22.86 163.068,22.86 ; 159.639,37.719 159.639,42.037 158.849,42.827 158.849,44.037 157.988,44.898 157.988,51.562 159.004,52.578 163.195,52.578 ; 163.068,20.32 163.068,12.573 164.211,11.43 164.211,10.414 ; 163.195,50.038 163.195,42.291 164.338,41.148 164.338,40.132 ; 169.037,19.431 169.037,22.86 ; 169.164,49.149 169.164,52.578 ; 172.339,17.018 168.91,17.018 168.91,13.208 176.911,13.208 ; 172.466,46.736 169.037,46.736 169.037,42.926 177.038,42.926 ; 176.911,7.62 176.911,10.668 178.673,10.668 181.229,13.224 ; 176.984,18.123 176.911,18.05 176.911,15.748 177.435,15.224 181.229,15.224 ; 177.038,37.338 177.038,40.386 178.8,40.386 181.356,42.942 ; 177.111,47.841 177.038,47.768 177.038,45.466 177.562,44.942 181.356,44.942 ; 181.356,18.944 181.229,18.817 181.229,15.224 ; 181.483,48.662 181.356,48.535 181.356,44.942 ; 183.896,10.16 184.404,10.668 184.404,13.224 ; 184.023,39.878 184.531,40.386 184.531,42.942 ; 184.404,15.224 181.229,15.224 ; 184.531,44.942 181.356,44.942 ; 3.937,34.163 45.847,34.163 45.847,58.801 3.937,58.801 3.937,34.163 ; 4.191,4.826 4.191,29.464 46.101,29.464 46.101,4.826 4.191,4.826 ; 50.292,34.036 92.202,34.036 92.202,58.674 50.292,58.674 50.292,34.036 ; 50.927,4.826 92.837,4.826 92.837,29.464 50.927,29.464 50.927,4.826 ; 97.663,34.671 139.573,34.671 139.573,59.309 97.663,59.309 97.663,34.671 ; 97.917,4.826 139.827,4.826 139.827,29.464 97.917,29.464 97.917,4.826 ; 144.653,5.08 186.563,5.08 186.563,29.718 144.653,29.718 144.653,5.08 ; 144.78,34.798 186.69,34.798 186.69,59.436 144.78,59.436 144.78,34.798

## Polygon pours and split planes (outlines as drawn)
GND on Top Layer "Top Layer-No Net" (solid, pour order 14): 4.191,29.464 46.101,29.464 46.101,4.826 4.191,4.826
no net on Top Layer "Top Layer-No Net" (solid, pour order 16): 3.937,58.801 45.847,58.801 45.847,34.163 3.937,34.163
no net on Top Layer "Top Layer-No Net" (solid, pour order 18): 50.292,58.674 92.202,58.674 92.202,34.036 50.292,34.036
no net on Top Layer "Top Layer-No Net" (solid, pour order 20): 97.663,59.309 139.573,59.309 139.573,34.671 97.663,34.671
no net on Top Layer "Top Layer-No Net" (solid, pour order 22): 144.78,59.436 186.69,59.436 186.69,34.798 144.78,34.798

## Other copper
Top Layer:
  region net GND: 39.568,13.054 39.534,12.96 39.554,12.917 39.551,12.902 38.194,11.546 38.088,11.59 37.965,12.074 38.329,12.954 37.996,13.758 38.248,14.158 39.568,14.158
  region: 86.304,13.054 86.27,12.96 86.29,12.917 86.287,12.902 84.93,11.546 84.824,11.59 84.701,12.074 85.065,12.954 84.732,13.758 84.984,14.158 86.304,14.158
  region: 307 vertices and 20 holes, not listed, extent 51.739,5.638 92.025,28.652
  region: 133.294,13.054 133.26,12.96 133.28,12.917 133.277,12.902 131.92,11.546 131.814,11.59 131.691,12.074 132.055,12.954 131.722,13.758 131.974,14.158 133.294,14.158
  region: 307 vertices and 20 holes, not listed, extent 98.729,5.638 139.015,28.652
  region: 180.03,13.308 179.996,13.214 180.016,13.171 180.013,13.156 178.656,11.8 178.55,11.844 178.427,12.328 178.791,13.208 178.458,14.012 178.71,14.412 180.03,14.412
  region: 307 vertices and 20 holes, not listed, extent 145.465,5.892 185.751,28.906
  region: 39.314,42.391 39.28,42.297 39.3,42.254 39.297,42.239 37.94,40.883 37.834,40.927 37.711,41.411 38.075,42.291 37.742,43.095 37.994,43.495 39.314,43.495
  region: 85.669,42.264 85.635,42.17 85.655,42.127 85.652,42.112 84.295,40.756 84.189,40.8 84.066,41.284 84.43,42.164 84.097,42.968 84.349,43.368 85.669,43.368
  region: 133.04,42.899 133.006,42.805 133.026,42.762 133.023,42.747 131.666,41.391 131.56,41.435 131.437,41.919 131.801,42.799 131.468,43.603 131.72,44.003 133.04,44.003
  region: 180.157,43.026 180.123,42.932 180.143,42.889 180.14,42.874 178.783,41.518 178.677,41.562 178.554,42.046 178.918,42.926 178.585,43.73 178.837,44.13 180.157,44.13